# Altium PCB DebugBoard.PcbDoc
Units mil, origin at the board's own origin, x right, y up, seen from the top; angles counter-clockwise.
Board outline 1300 x 1525 mil, 2 copper layers (Top Layer, Bottom Layer), stack 83.452 mil thick; 19 components, 18 nets, 99 pads, 21 vias.
Unrouted connection lines stored in the file: 18.
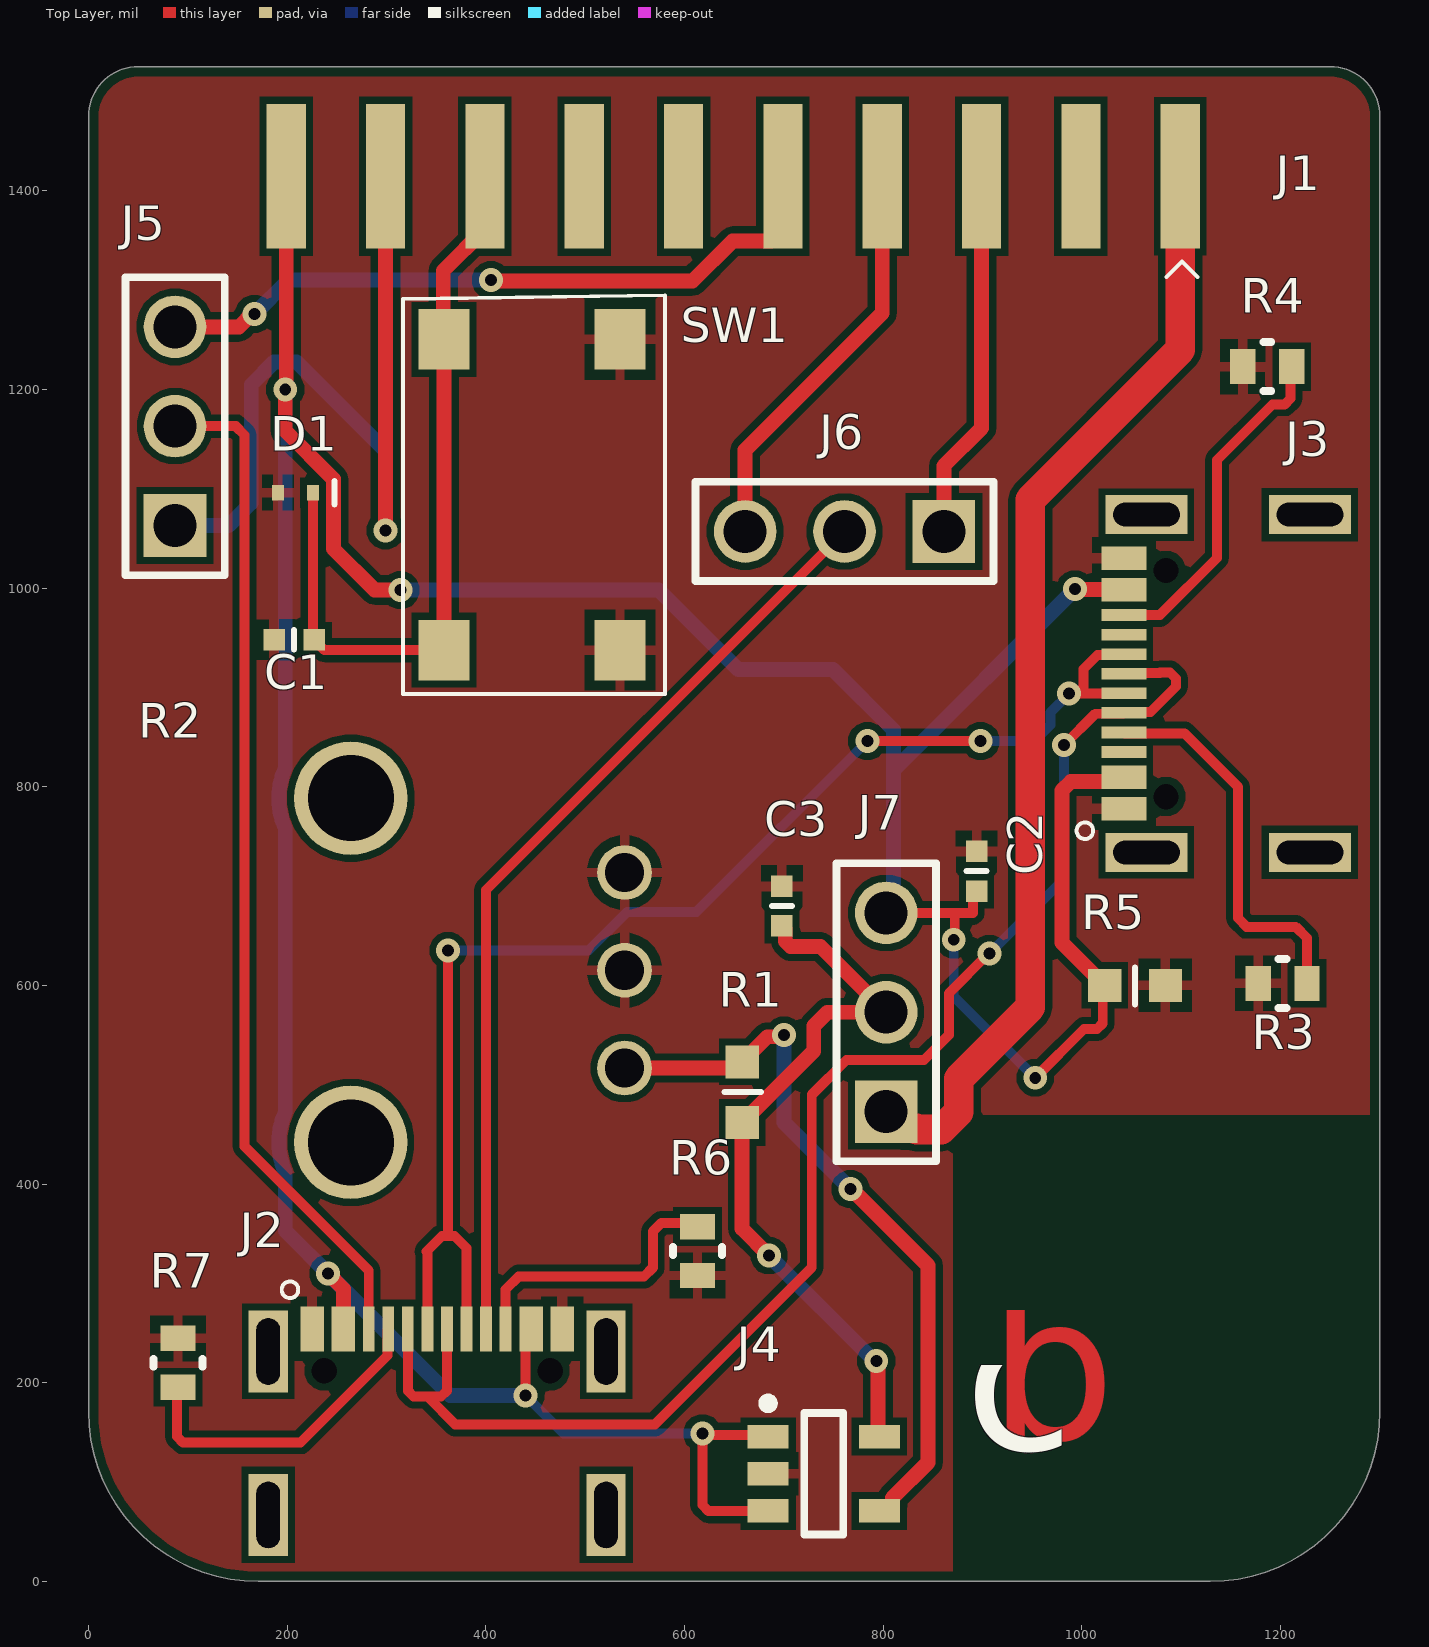
[diagram p0: Top Layer view]
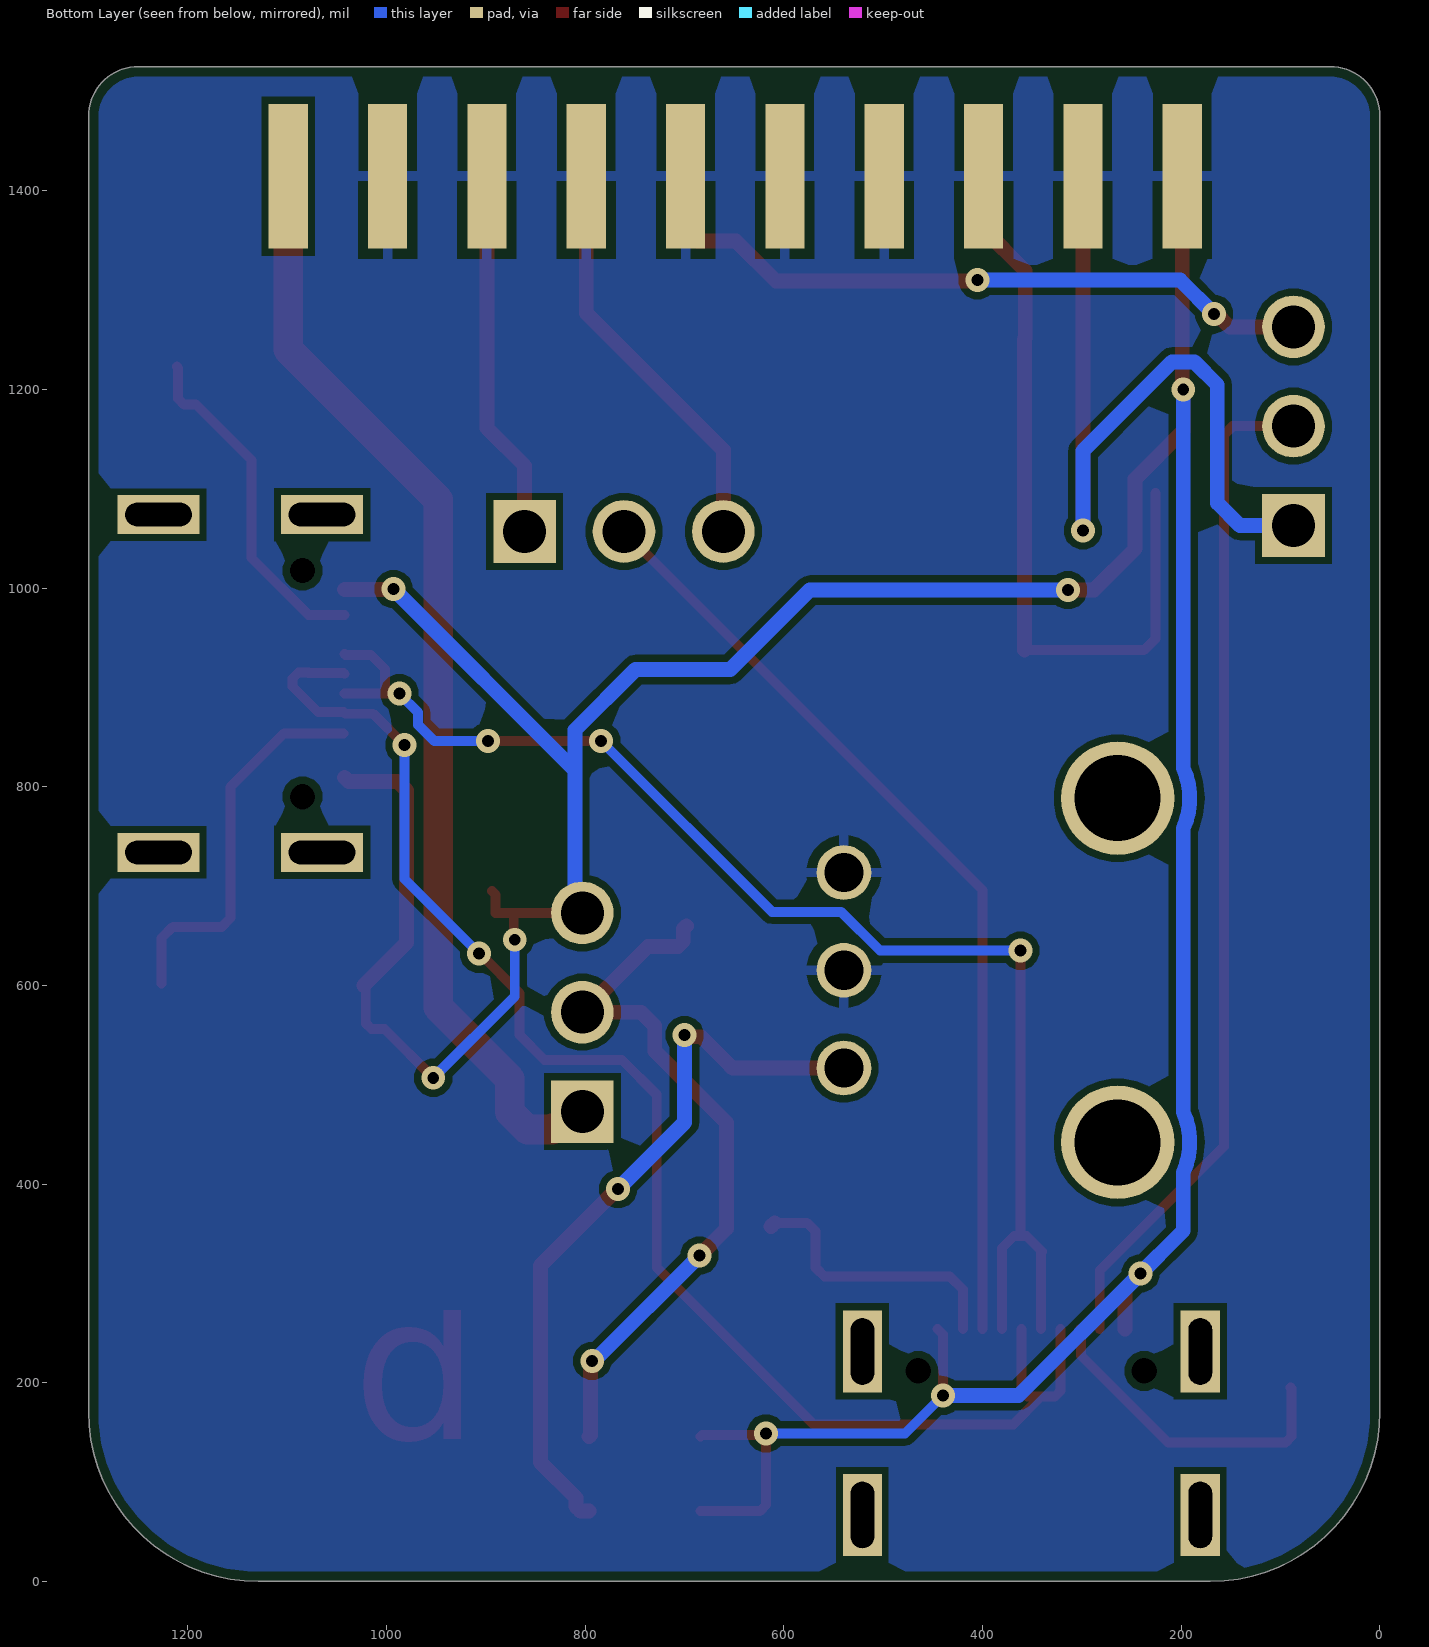
[diagram p1: Bottom Layer view, seen from below]
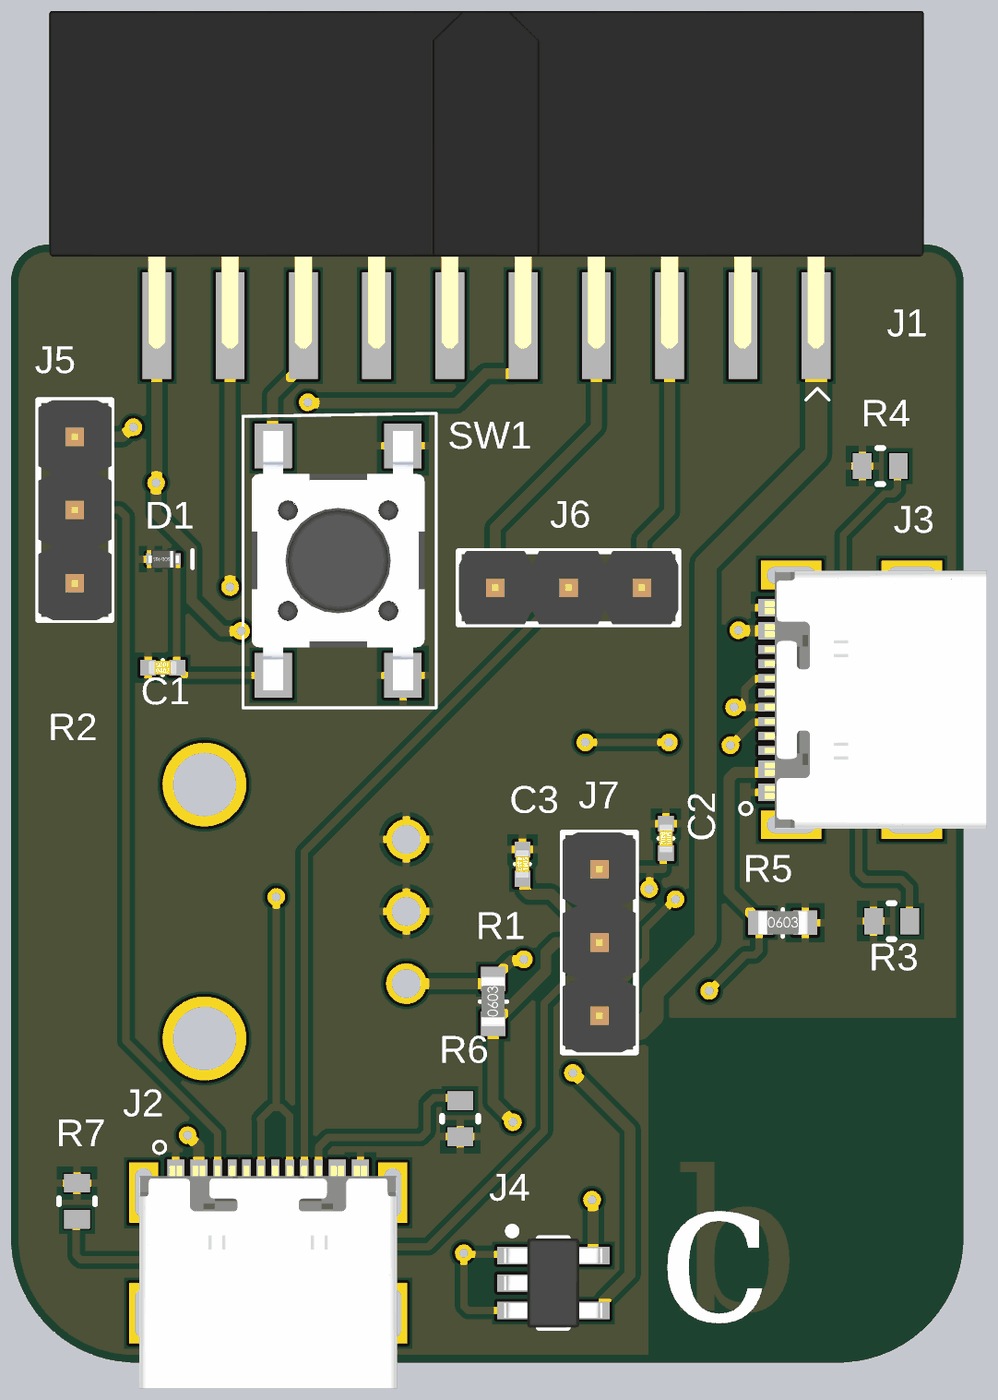
[diagram p2: 3D render of the assembled board from above, using the file's embedded part models]

## Layer stack, top to bottom
Top Solder: solder mask 0.4, Solder Resist, Dk 3.5
Top Layer: signal copper 1.4
Dielectric 1: dielectric 80.652, FR-4, Dk 4.8
Bottom Layer: signal copper 1.4
Bottom Solder: solder mask 0.4, Solder Resist, Dk 3.5

## Board outline
0,170.71 0,1475 cw(c50,1475) 50,1525 1250,1525 cw(c1250,1475) 1300,1475 1300,170.71 cw(c1129.29,170.71) 1129.29,0 170.71,0 cw(c170.71,170.71)

## Design rules (kind name [scope] priority, off if disabled: settings)
BoardOutlineClearance [All] p1: gap=10 ignorepadtopadclearanceinfootprint=FALSE
Clearance [All] p1: gap=7 ignorepadtopadclearanceinfootprint=FALSE
DiffPairsRouting [All] p1: maxlimit=10 minlimit=2.5 mostfreqgap=5 toplayer_minwidth=7 toplayer_maxwidth=18 toplayer_prefwidth=18 bottomlayer_minwidth=7 bottomlayer_maxwidth=18 bottomlayer_prefwidth=18 impedanceprofiledriven=TRUE maxuncoupledlength=500
HoleSize [All] p1: absolutevalues=TRUE maxlimit=196.85 minlimit=6.02 maxpercent=80.000 minpercent=20.000
MinimumSolderMaskSliver [All] p1: minsoldermaskwidth=1
PolygonConnect [All] p1: thpad.connectstyle=Relief thpad.reliefconductorwidth=10 thpad.reliefentries=4 thpad.polygonreliefangle="90 Angle" thpad.airgapwidth=10 smdpad.connectstyle=Relief smdpad.reliefconductorwidth=10 smdpad.reliefentries=4 smdpad.polygonreliefangle="90 Angle" smdpad.airgapwidth=10 via.connectstyle=Direct via.reliefconductorwidth=10 via.reliefentries=4 via.polygonreliefangle="90 Angle" via.airgapwidth=10
RoutingVias [All] p1: holewidth=12.01 width=24.02 viastyle="Through Hole" minholewidth=10 minwidth=20 maxholewidth=19.68 maxwidth=50
SilkToSolderMaskClearance [IsPad] p1: minsilkscreentomaskgap=1 clearancetoexposedcopper=TRUE
SolderMaskExpansion [All] p1: expansion=4 istentingtop=FALSE
SupplyNets "Schematic Supply Nets_3" [InNet('GND')] p1: voltage=0.000
SupplyNets "Schematic Supply Nets_2" [InNet('V_OUT')] p2: voltage=0.000
SupplyNets "Schematic Supply Nets_1" [InNet('VSRC_SEGGER')] p3: voltage=0.000
SupplyNets "Schematic Supply Nets" [InNet('VDD_DUT')] p4: voltage=0.000
Width [All] p1: maxlimit=1000 minlimit=8.03 preferedwidth=10 minimp=50.000000 maximp=50.000000 favimp=50.000000
26 further rules are at their usual default settings.

## Components (designator, comment, footprint, x,y, rotation, side; value= is the part's Value field where it differs from the comment)
C1 "GCM155R71H104KE02D" CAP-0402 207,948 r0 top value=0.1µF
C2 "0402ZD105KAT2A" CAP-0402 894,715 r270 top
C3 "0402ZD105KAT2A" CAP-0402 698,680 r270 top
D1 "CPDQ3V3U-HF" DIODE-SOD923f 208.29,1096.01 r0 top
J1 "SFH11-PBPC-D10-ST-BK" HDR-V-2X10-F-2.54MM 649,1454 r0 top
J2 "USB4105" CONN-USBC-GCT_USB4105 350.92,254.2 r0 top
J3 "USB4105" CONN-USBC-GCT_USB4105 1042.36,903.92 r90 top
J4 "RT9043GB" MCHP-SOT23-5_N 740.1,108.4 r0 top
J5 "61300311121" HDR-V-1X3 87,1163 r90 top
J6 "61300311121" HDR-V-1X3 761,1057 r180 top
J7 "61300311121" HDR-V-1X3 803,573 r90 top
R1 "RC0603FR-0710KL" RES-0603 658,492.51 r270 top
R2 "P0915N-EC15BR100K" POT-PTV09A-1 264,615.23 r90 top
R3 "5.1K" R0603 1202,602 r0 top
R4 "5.1K" R0603 1186.61,1223 r0 top
R5 "RC0603FR-0710KL" RES-0603 1053.51,600 r180 top
R6 "5.1K" R0603 613,332.61 r90 top
R7 "5.1K" R0603 90,220 r270 top
SW1 "PTS645SK50SMTR92 LFS" BTN-SPST-PTS645SK50SMTR92 446.42,1093.99 r90 top

## Footprints (in the part's own frame and the unit in brackets; to place one, negate y for a bottom-side part, rotate by r counter-clockwise, add the part's x,y. Pads: shape width x height; smd on the part's side, far side on the other; paste and mask are expansions set on the pad)
BTN-SPST-PTS645SK50SMTR92 [mm]
  rect 1.55x1.3 smd: 1(-3.975,2.25) 2(3.975,2.25) 3(-3.975,-2.25) 4(3.975,-2.25)
  silkscreen extent -5.1,-3.4 5.1,3.3, body extent -4.5,-3 4.5,3, height 5.1
CAP-0402 [mm]
  rect 0.55x0.55 smd: 1(-0.508,0) 2(0.508,0)
  silkscreen extent 0,-0.25 0,0.25, body extent -0.5,-0.25 0.5,0.25, height 0.5
CONN-USBC-GCT_USB4105 [mm]
  rect 0.6x1.15 smd: A1(-3.2,0) A4(-2.4,0) A9(2.4,0) A12(3.2,0)
  rect 0.3x1.15 smd: A5(-1.25,0) A6(-0.25,0) A7(0.25,0) A8(1.25,0) B5(1.75,0) B6(0.75,0) B7(-0.75,0) B8(-1.75,0)
  rect 1x2.1 hole 0.6 slot 1.7 at 90 deg: ME(-4.32,-4.755) ME(-4.32,-0.575) ME(4.32,-4.755) ME(4.32,-0.575)
  round 0.4 hole 0.65 unplated: ""(-2.89,-1.075) ""(2.89,-1.075)
  silkscreen extent -3.97,0.79 -3.55,1.21, body extent -4.47,-7.35 4.47,0.35, height 3.26
DIODE-SOD923f [mm]
  rect 0.3x0.4 smd: 1(0.45,0) 2(-0.45,0)
  silkscreen extent 1,-0.3 1,0.3, body extent -0.53,-0.32 0.52,0.32, height 0.43
HDR-V-1X3 [mm]
  rect 1.6x1.6 hole 1.1: 1(-2.54,0)
  round 1.6 hole 1.1: 2(0,0) 3(2.54,0)
  silkscreen extent -3.81,-1.27 3.81,1.27, body extent -3.81,-1.27 3.81,1.27, height 8.55
HDR-V-2X10-F-2.54MM [mm]
  rect 1x3.7 smd: 1(11.43,-1) 3(8.89,-1) 5(6.35,-1) 7(3.81,-1) 9(1.27,-1) 11(-1.27,-1) 13(-3.81,-1) 15(-6.35,-1) 17(-8.89,-1) 19(-11.43,-1)
  rect 1x3.7 smd far side: 2(11.43,-1) 4(8.89,-1) 6(6.35,-1) 8(3.81,-1) 10(1.27,-1) 12(-1.27,-1) 14(-3.81,-1) 16(-6.35,-1) 18(-8.89,-1) 20(-11.43,-1)
  silkscreen extent 11.08,-3.58 11.88,-3.18, body extent -15.16,-1.8 15.16,9.9, height 3.04
MCHP-SOT23-5_N [mm] "SOT23, 5-Leads, Body 3.10x1.80mm, Pitch 0.95mm, IPC Medium Density"
  rect 1.05x0.6 smd: 1(-1.425,0.95) 2(-1.425,0) 3(-1.425,-0.95) 4(1.425,-0.95) 5(1.425,0.95)
  silkscreen extent -1.55,-1.55 0.5,1.92, body extent -1.7,-1.55 1.7,1.55, height 1.45
POT-PTV09A-1 [mm] "Pot, vertical, single turn, PCB mount, TH"
  round 1.4 hole 1: 1(-2.5,-7) 2(0,-7) 3(2.5,-7)
  round 2.9 hole 2.2: ME(-4.4,0) ME(4.4,0)
  body extent -4.85,-7.4 4.85,7, height 20
R0603 [mm]
  rect 0.65x0.9 smd paste+0 mask+0.05: 1(-0.625,0) 2(0.625,0)
  silkscreen extent -0.1,-0.63 0.1,0.63, body extent -0.76,-0.38 0.76,0.38, height 0.46
RES-0603 [mm]
  rect 0.85x0.85 smd: 1(-0.775,0) 2(0.775,0)
  silkscreen extent 0,-0.46 0,0.48, body extent -0.85,-0.4 0.85,0.4, height 0.56

## Part data
C1: library part CAP-0.1uF-50V-0402, "CAP CER 0.1UF 50V X7R 0402 10%", Capacitance=100nF, Case Code (Imperial)=0402, Case Code (Metric)=1005, Dielectric=X7R, Manufacturer 1=Murata, Max Operating Temperature=125°C, Min Operating Temperature=-55°C, Package Quantity=10000, Ratings=AEC-Q200, Supplier Part Number 1=490-10672-1-ND, Tolerance=10%, Voltage Rating=50V, Case/Package=0402, ComponentLink1Description=http://www.mouser.com/ds/2/281/c03e-806517.pdf?src-supplier=Mouser, ComponentLink1URL=http://www.mouser.com/ds/2/281/c03e-806517.pdf?src-supplier=Mouser, ComponentLink2Description=http://www.farnell.com/datasheets/2079122.pdf?src-supplier=Farnell, ComponentLink2URL=http://www.farnell.com/datasheets/2079122.pdf?src-supplier=Farnell, ComponentLink3Description=http://www.farnell.com/datasheets/2079122.pdf?src-supplier=Newark, ComponentLink3URL=http://www.farnell.com/datasheets/2079122.pdf?src-supplier=Newark, ComponentLink4Description=http://www.farnell.com/datasheets/2079122.pdf?src-supplier=Element14, ComponentLink4URL=http://www.farnell.com/datasheets/2079122.pdf?src-supplier=Element14, ComponentLink5Description=http://search.murata.co.jp/Ceramy/image/img/A01X/partnumbering_e_02.pdf?src-supplier=Digi-Key, ComponentLink5URL=http://search.murata.co.jp/Ceramy/image/img/A01X/partnumbering_e_02.pdf?src-supplier=Digi-Key, Height=0.5mm, Lead Free="Lead Free", Length=0.039inch, Manufacturer Part Number 1=GCM155R71H104KE02D, Mount="Surface Mount", Packaging="Tape and Reel", Pricing 1="1=0.10000, 10=0.06100, 100=0.02730, 500=0.01952, 1000=0.01533, 2500=0.01394, 5000=0.01282 (USD)", REACH SVHC="No SVHC", RoHS=Yes, Stock 1=254896, Supplier 1=Digi-Key, Termination=SMD/SMT, Thickness=0.022inch, Voltage Rating (DC)=50V, Weight=0.000212oz, Width=0.5mm
C2 C3: library part CAP-1uF-10V-0402, "AVX - 0402ZD105KAT2A - SMD Multilayer Ceramic Capacitor, 1 µF, 10 V, 0402 [1005 Metric], ± 10%, X5R, AVX 0402 MLCC", Capacitance=1uF, Case Code (Imperial)=0402, Case Code (Metric)=1005, Dielectric=X5R, Dielectric Material=Ceramic, Manufacturer 1="Kyocera AVX", Max Operating Temperature=85°C, Min Operating Temperature=-55°C, Package Quantity=1, Supplier Part Number 1=478-4596-1-ND, Tolerance=10%, Voltage=10V, Case/Package=0402, Category="Ceramic Capacitors", ComponentLink1Description=https://datasheet.ciiva.com/151/cx5r-151901.pdf?src-supplier=Digi-Key, ComponentLink1URL=https://datasheet.ciiva.com/151/cx5r-151901.pdf?src-supplier=Digi-Key, ComponentLink2Description=https://datasheet.ciiva.com/151/cx5r-151902.pdf?src-supplier=Digi-Key, ComponentLink2URL=https://datasheet.ciiva.com/151/cx5r-151902.pdf?src-supplier=Digi-Key, ComponentLink3Description=https://datasheet.ciiva.com/151/cx5r-151903.pdf?src-supplier=Digi-Key, ComponentLink3URL=https://datasheet.ciiva.com/151/cx5r-151903.pdf?src-supplier=Digi-Key, ComponentLink4Description=https://datasheet.ciiva.com/11464/cx5r-11464568.pdf?src-supplier=Avnet, ComponentLink4URL=https://datasheet.ciiva.com/11464/cx5r-11464568.pdf?src-supplier=Avnet, ComponentLink5Description=https://datasheet.ciiva.com/6159/lt-6159749.pdf?src-supplier=Farnell, ComponentLink5URL=https://datasheet.ciiva.com/6159/lt-6159749.pdf?src-supplier=Farnell, ComponentLink6Description=https://datasheet.ciiva.com/1124/1666675-1124066.pdf?src-supplier=Element14, ComponentLink6URL=https://datasheet.ciiva.com/1124/1666675-1124066.pdf?src-supplier=Element14, ComponentLink7Description=https://datasheet.ciiva.com/1124/1666675-1124067.pdf?src-supplier=Element14, ComponentLink7URL=https://datasheet.ciiva.com/1124/1666675-1124067.pdf?src-supplier=Element14, ComponentLink8Description=https://datasheet.ciiva.com/16448/cx5r-16448997.pdf?src-supplier=Future+Electronics, ComponentLink8URL=https://datasheet.ciiva.com/16448/cx5r-16448997.pdf?src-supplier=Future+Electronics, Construction=Flat, Contact Plating=Tin,Matte, Depth=0.5mm, Height=0.56mm, Lead Free="Lead Free", Lead Pitch=5.08mm, Length=1mm, Manufacturer Part Number 1=0402ZD105KAT2A, Mount="Surface Mount", Packaging="Cut Tape", Pricing 1="1=0.12000, 10=0.08800, 50=0.05000, 100=0.04140, 500=0.02900, 1000=0.02401, 2500=0.02235, 5000=0.02045 (USD)", Radiation Hardening=No, REACH SVHC="No SVHC", RoHS=Yes, RoHS Compliant=Yes, Series=-, Stock 1=2474650, Supplier 1=Digi-Key, Termination=SMD/SMT, Thickness=0.022inch, Voltage Rating=10V, Voltage Rating (DC)=10V, Width=0.02inch
D1: library part DIODE-TVS-3.3V-SOD923F, "TVS DIODE 3.3V 10.4V SOD923F", Breakdown Voltage=5V, Clamping Voltage=14.1V, Manufacturer 1=Comchip, Max Operating Temperature=150°C, Min Operating Temperature=-55°C, Package Quantity=8000, Peak Pulse Current=9.8A, Peak Pulse Power=102W, Power Line Protection=No, Resistor Type=Zener, Reverse Standoff Voltage=3.3V, Supplier Part Number 1=641-1477-1-ND, Category="TVS Diodes", ComponentLink1Description=https://datasheet.ciiva.com/6578/cpdq3v3u-hf-6578247.pdf?src-supplier=Digi-Key, ComponentLink1URL=https://datasheet.ciiva.com/6578/cpdq3v3u-hf-6578247.pdf?src-supplier=Digi-Key, ComponentLink2Description=https://datasheet.ciiva.com/12545/cpdq3v3u-hf-216634-12545533.pdf?src-supplier=Mouser, ComponentLink2URL=https://datasheet.ciiva.com/12545/cpdq3v3u-hf-216634-12545533.pdf?src-supplier=Mouser, Diode Type=ZENER, Manufacturer Part Number 1=CPDQ3V3U-HF, Min Breakdown Voltage=5V, Mount="Surface Mount", Number of Channels=1, Number of Unidirectional Channels=1, Packaging="Tape and Reel", Pricing 1="1=0.35000, 10=0.29000, 100=0.15360, 500=0.10106, 1000=0.06872, 2000=0.06199 (USD)", RoHS=Yes, RoHS Compliant=Yes, Series=-, Stock 1=9425, Supplier 1=Digi-Key, Termination=SMD/SMT
J1: library part HDR-V-2X10-F-2.54MM, "20 Position Header Connector 0.100\" (2.54mm) Through Hole Gold", Color=Black, Manufacturer 1=Sullins, Package Quantity=1, Supplier Part Number 1=S9197-ND, Category="Headers and Wire Housings", ComponentLink1Description=https://datasheet.ciiva.com/754/sfh11-pxxc-dxx-st-xx11160-c-754558.pdf?src-supplier=Digi-Key, ComponentLink1URL=https://datasheet.ciiva.com/754/sfh11-pxxc-dxx-st-xx11160-c-754558.pdf?src-supplier=Digi-Key, Connector Type=Header, Contact Plating=Gold, Contact Type="Female Socket", Lead Free="Lead Free", Manufacturer Part Number 1=SFH11-PBPC-D10-ST-BK, Mount="Through Hole", Number of Positions=20, Number of Rows=2, Packaging=Tray, Pitch=0.1inch, Pricing 1="1=1.15000, 10=0.96800, 80=0.86925, 440=0.71118, 1000=0.63216, 5000=0.57070 (USD)", RoHS=Yes, RoHS Compliant=Yes, Row Spacing=0.1inch, Series=SFH11, Stock 1=51703, Supplier 1=Digi-Key, Termination=Solder
J2 J3: library part CONN-F-USB-C-GCT_USB4105, "Usb Conn, 2.0 Type C, Rcpt, 16Pos, Smt Rohs Compliant: Yes", Manufacturer 1="Global Connector Technology", Manufacturer Part Number 1=USB4105-GF-A, Supplier Part Number 1=86AH2021, Pricing 1="1=0.85100, 10=0.69300, 25=0.63100, 50=0.58700, 100=0.54000 (USD)", RoHS=No, Stock 1=1960, Supplier 1=Newark
J4: library part CMP-00001-3, "Linear Voltage Regulator IC Positive Adjustable 1 Output 1.2 V ~ 3.3 V 400mA SOT-23-5", Case/Package=SOT-23-5, Dropout Voltage=230mV, Max Operating Temperature=85°C, Max Output current=400mA, Max Supply Voltage=5.5V, Min Input Voltage=2.2V, Min Operating Temperature=-40°C, Output Voltage=3.3V, Power Rating=400mW, Quiescent Current=50uA, Lead Free="Lead Free", Min Current Limit=400mA, Mounting Technology="Surface Mount", Number of Outputs=1, Number of Regulators=1, Output Current=400mA, Packaging="Cut Tape", Pins=5, Reach SVHC Compliant=No, RoHS Compliant=Yes, Series=-
J5 J6 J7: library part HDR-V-1X3-M, "Header, 3-Pin, 0.1\"", Colour=Black, Manufacturer="Wurth Electronics", Supplier Part Number 1=732-5316-ND, ComponentLink1Description=http://www.farnell.com/cad/1737268.pdf, ComponentLink1URL=http://www.farnell.com/cad/1737268.pdf, ComponentLink2Description=http://katalog.we-online.de/em/datasheet/6130xx11121.pdf, ComponentLink2URL=http://katalog.we-online.de/em/datasheet/6130xx11121.pdf, Connector Type="Male Pin", Contact Material=Copper, Contact Mating Length=0.236inch, Contact Plating=Gold, Gender=Male, LatestRevisionDate=17-Jul-2002, LatestRevisionNote="Re-released for DXP Platform.", Lead Free="Lead Free", Manufacturer 1="Wurth Electronics", Manufacturer Part Number 1=61300311121, Mount="Through Hole", MPN=61300311121, Number of Contacts=3, Number of Positions=3, Number of Rows=1, Packaging=Bulk, Pitch=0.1inch, Pricing 1="1=0.13, 10=0.106, 25=0.088, 50=0.074, 100=0.067, 1000=0.061 (USD)", Publisher="Altium Limited", REACH SVHC=Unknown, Stock 1=41782, Supplier 1=Digi-Key, Termination=Solder
R1 R5: library part RES-10K-0603-1%, "Res General Purpose Thick Film 0603 10K Ohm 1% 1/10W ±100ppm/°C Molded SMD Paper T/R", Case Code (Imperial)=0603, Case Code (Metric)=1608, Manufacturer 1=Yageo, Max Operating Temperature=155°C, Min Operating Temperature=-55°C, Power Rating=100mW, Resistance=10kΩ, Supplier Part Number 1=311-10.0KHRCT-ND, Temperature Coefficient=100ppm/°C, Tolerance=1%, Voltage Rating=75V, Voltage Rating (DC)=50V, Case/Package=0603, Category="Chip SMD Resistors", ComponentLink1Description=https://datasheet.ciiva.com/7660/38590-7660789.pdf?src-supplier=Element14, ComponentLink1URL=https://datasheet.ciiva.com/7660/38590-7660789.pdf?src-supplier=Element14, ComponentLink2Description=https://datasheet.ciiva.com/15189/getdatasheetpartid-409289-15189591.pdf?src-supplier=Verical, ComponentLink2URL=https://datasheet.ciiva.com/15189/getdatasheetpartid-409289-15189591.pdf?src-supplier=Verical, ComponentLink3Description=https://datasheet.ciiva.com/46440/1868787-46440891.pdf?src-supplier=Element14, ComponentLink3URL=https://datasheet.ciiva.com/46440/1868787-46440891.pdf?src-supplier=Element14, ComponentLink4Description=https://datasheet.ciiva.com/7983/443971-7983596.pdf?src-supplier=Element14, ComponentLink4URL=https://datasheet.ciiva.com/7983/443971-7983596.pdf?src-supplier=Element14, ComponentLink5Description=https://datasheet.ciiva.com/7746/1738695-7746239.pdf?src-supplier=Element14, ComponentLink5URL=https://datasheet.ciiva.com/7746/1738695-7746239.pdf?src-supplier=Element14, ComponentLink6Description=https://datasheet.ciiva.com/22747/443971-22747519.pdf?src-supplier=Element14, ComponentLink6URL=https://datasheet.ciiva.com/22747/443971-22747519.pdf?src-supplier=Element14, Composition="Thick Film", Depth=0.8mm, Height=0.45mm, Lead Free="Lead Free", Lead Pitch=0.3mm, Length=1.6mm, Manufacturer Part Number 1=RC0603FR-0710KL, Military Standard=Not, Number of Pins=2, Packaging="Tape and Reel", Pricing 1="1=0.10000, 10=0.02200, 100=0.00900, 1000=0.00405, 2500=0.00352 (USD)", REACH SVHC="No SVHC", RoHS=Yes, Stock 1=10827165, Supplier 1=Digi-Key, Termination=SMD/SMT, Weight=7.1E-05oz, Width=0.8mm
R2: library part POT_100K_PCBMOUNT, "Pot, 100k, vertical, single turn, PCB mount, TH, P0915N-EC15BR100K", Manufacturer 1="TT Electronics/BI", Manufacturer Part Number 1=P0915N-EC15BR100K
R3 R4 R6 R7: library part RES_5_1K, "RES 5.1K OHM 1% 1/10W 0603", Manufacturer=YAGEO, Manufacturer Part Number=RC0603FR-075K1L, Power=0.1W, ComponentLink1Description=Datasheet, ComponentLink1URL=https://www.yageo.com/upload/media/product/products/datasheet/rchip/PYu-RC_Group_51_RoHS_L_12.pdf, PCB Footprint=R0603
SW1: library part BTN-SPST-PTS645SK50SMTR92, "C & K COMPONENTS - PTS645SK50SMTR92LFS - SWITCH, SPST, 0.05A, 12VDC, SMD, 5MM", Case/Package=SMD/SMT, Color=Red, Contact Resistance=100mR, Current Rating=50mA, Manufacturer 1="ITT C&K", Manufacturer Part Number 1=PTS645SK50SMTR92LFS, Max Operating Temperature=60°C, Max Voltage Rating (DC)=12V, Min Operating Temperature=-20°C, Operating Force=260gf, Package Quantity=1, Supplier Part Number 1=CKN9087CT-ND, Actuator Length=1.55mm, Actuator Material=Nylon,Polyamide,PA66, Actuator Type=Standard, Category="Tactile Switches", ComponentLink1Description=https://datasheet.ciiva.com/29903/getdatasheetpartid-741134-29903854.pdf?src-supplier=Verical, ComponentLink1URL=https://datasheet.ciiva.com/29903/getdatasheetpartid-741134-29903854.pdf?src-supplier=Verical, ComponentLink2Description=https://datasheet.ciiva.com/14920/pts645-14920581.pdf?src-supplier=Digi-Key, ComponentLink2URL=https://datasheet.ciiva.com/14920/pts645-14920581.pdf?src-supplier=Digi-Key, ComponentLink3Description=https://datasheet.ciiva.com/22637/1707731-22637358.pdf?src-supplier=Element14, ComponentLink3URL=https://datasheet.ciiva.com/22637/1707731-22637358.pdf?src-supplier=Element14, Contact Material=Bronze, Contact Plating=Silver, Depth=9mm, Illumination Type=Non-Illuminated,Illuminated, Lead Free="Lead Free", Length=6mm, Max Current Rating=50mA, Mechanical Life=100000Cycles, Mount="Surface Mount", Orientation=Straight, Packaging="Tape and Reel", Pricing 1="1=0.15000, 10=0.14900, 25=0.14120, 100=0.12840, 250=0.12068, 500=0.11042 (USD)", REACH SVHC="No SVHC", RoHS=Yes, RoHS Compliant=Yes, Series=PTS645, Stock 1=52601, Supplier 1=Digi-Key, Switch Function=Off-Mom, Termination="Gull Wing", Throw Configuration=SPST, Voltage Rating (DC)=12V

## Via types
v1: diameter 24.02, hole 12.01, Top Layer to Bottom Layer, 21 vias

## Nets (pads, with @x,y where several pads share a name; then routed paths per layer and width w, separated by ;. In a path a pad name is that pad's centre, name@x,y a point inside that pad or via, vN(x,y) a via of type N, cw(c..) or ccw(c..) an arc to the next point about the centre after c; other vN are vias at no path point)
D_MINUS: J2.A7 J2.B7 J3.A7 J3.B7 | length 1510.9
  Top Layer w10: J2.B7 321.39,191.86 327.25,186 341.08,186 ; J2.A7 360.76,191.86 354.91,186 341.08,186 ; v1(907,632) 906,632 866,592 866,550 841,525 763,525 728,490 728,316 570,158 369.08,158 341.08,186 ; v1(982.01,842.06) 1013.44,873.49 1041.46,873.49 J3.B7 1043.27,875.3 1069.1,875.3 1094.66,900.86 1094.66,909.14 1088.8,915 1078.8,915 1078.47,914.67 1043.27,914.67 J3.A7
  Bottom Layer w10: v1(907,632) 982,707 v1(982.01,842.06)
D_PLUS: J2.A6 J2.B6 J3.A6 J3.B6 | length 1370.3
  Top Layer w10: J2.A6 341.08,331.17 340.12,332.12 355.79,347.79 362,347.79 ; v1(362,635) 362,347.79 ; J2.B6 380.45,335.55 368.21,347.79 362,347.79 ; v1(784,846) v1(898,846) ; v1(987,894) 989.68,896.68 1001.68,896.68 ; J3.A6 1042.32,894.04 999.04,894.04 1001.68,896.68 ; J3.B6 1041.46,932.54 1015.63,932.54 1001.68,918.6 1001.68,896.68
  Bottom Layer w10: v1(362,635) 503.42,635 542.51,674.09 612.09,674.09 v1(784,846) ; v1(898,846) 952,846 968.16,862.16 968.16,874.65 987,893.49 v1(987,894)
GND: C1.1 C2.1 C3.1 D1.2 J1.4 J1.6 J1.8 J1.10 J1.12 J1.14 J1.16 J1.18 J1.20 J2.A1 J2.A12 J3.A1 J3.A12 J4.2 R2.2 R2.3 R3.1 R4.1 R5.1 R6.1 R7.1 SW1.3 SW1.4
NetJ2_A5: J2.A5 R7.2 | length 327.5
  Top Layer w10: R7.2 89,194.39 89,145.86 94.86,140 213.33,140 300.8,227.47 300.8,253.3 J2.A5
NetJ2_B5: J2.B5 R6.2 | length 283.5
  Top Layer w10: J2.B5 419.82,293.82 433,307 559.21,307 568,315.79 568,352.21 576.79,361 R6.2@609.21,361
  Top Layer w15: R6.2@609.21,361 R6.2
NetJ3_A5: J3.A5 R3.2 | length 391.4
  Top Layer w10: J3.A5@1043.57,853.5 1103.5,853.5 1157,800 1157,667.79 1165.79,659 1215.21,659 1226.61,647.61 R3.2
NetJ3_B5: J3.B5 R4.2 | length 348.4
  Top Layer w10: J3.B5 1078.4,972.82 1136,1030.41 1136,1129 1191.98,1184.98 1204.18,1184.98 1210.04,1190.84 1210.04,1221.82 R4.2
NetJ4_4: J4.4 R1.1 R2.1 | length 739.2
  Top Layer w15: R2.1 651.78,516.8 R1.1 683.33,548.35 698.35,548.35 v1(700,550) ; v1(767,395) 768,395 845,318 845,119.8 809.37,84.17 809.37,75.31 805.06,71 J4.4
  Bottom Layer w15: v1(700,550) 700,462 v1(767,395)
NRST: C1.2 D1.1 J1.15 SW1.1 SW1.2 | length 726.7
  Top Layer w10: D1.1 226,949 C1.2 237.5,937.5 SW1.1 ; SW1.2@357,1251.32 SW1.2
  Top Layer w15: SW1.2@357,1251.32 357,1319.48 J1.15@399,1361.48 ; SW1.1 SW1.2 ; J1.15 J1.15@400,1413.63
SBU1: J2.A8 J6.2 | length 952.3
  Top Layer w10: J2.A8 400.13,696.13 J6.2
SBU2: J2.B8 J5.2 | length 1025.4
  Top Layer w10: J5.2 148.21,1163 157,1154.21 157,438 282.02,312.98 J2.B8
SWCLK/TCLK: J1.9 J5.3 | length 706.8
  Top Layer w15: J5.3 151.56,1263 164.56,1276 v1(167,1276) ; v1(405,1310) 406,1309 607.85,1309 648.15,1349.3 686.81,1349.3 699,1361.48 J1.9
  Bottom Layer w15: v1(167,1276) 201,1310 v1(405,1310)
SWDIO/TMS: J1.7 J6.3 | length 415.5
  Top Layer w15: J6.3 661,1139 799,1277 J1.7 J1.7@799.5,1414.13
UART_RX: J1.17 J5.1 | length 823.5
  Top Layer w15: v1(299,1058) J1.17
  Bottom Layer w15: J5.1 141,1063 163.79,1085.8 163.79,1204.74 186.59,1227.54 209.41,1227.54 299,1137.95 v1(299,1058)
UART_TX: J1.5 J6.1 | length 373.4
  Top Layer w15: J6.1 861,1123 899,1161 J1.5
V_OUT: C3.2 J4.5 J7.2 R1.2 | length 728.5
  Top Layer w15: v1(685,328) 658,355 R1.2 730,534 730,559.14 743.86,573 J7.2 737,639 706.79,639 701.33,644.46 701.33,656.67 C3.2 ; v1(793,222) 794.6,220.4 794.6,147.41 J4.5
  Bottom Layer w15: v1(685,328) 791,222 v1(793,222)
VDD_DUT: J1.1 J7.1 | length 1122.2
  Top Layer w30: J7.1 819.5,456.5 832.07,456.5 833.57,455 858.43,455 876,472.57 876,506 948,578 948,1089 1099,1240 J1.1
VSRC_SEGGER: C2.2 J1.19 J2.A4 J2.A9 J3.A4 J3.A9 J4.1 J4.3 J7.3 R5.2 | length 3949.8
  Top Layer w10: v1(440,187) 439.91,187.09 439.91,248.7 J2.A9 ; J4.3 623.86,71 618,76.86 v1(618,149) 619.6,147.4 682.4,147.4 J4.1 ; J7.3@804.5,671.5 J7.3 872,673 ; v1(871,646) 872,647 872,673 ; C2.2 890.14,691.14 890.14,673 872,673 ; v1(953,507) 1002,556 1015.14,556 1021,561.86 1021,598 R5.2
  Top Layer w15: J1.19 199,1201 v1(198,1200) 198,1158.29 246.41,1109.88 246.41,1039.59 288,998 v1(314,998) ; v1(241,310) 256.43,294.57 J2.A4 ; v1(993,999) 993.59,998.41 J3.A9 ; R5.2 980,643 980,796.34 988.79,805.12 1038.05,805.12 J3.A4
  Bottom Layer w10: v1(440,187) 478,149 v1(618,149) ; v1(871,646) 871,589 v1(953,507)
  Bottom Layer w15: v1(198,1200) 198,818.75 ccw(c264,788.46) 198,758.17 198,472.29 ccw(c264,442) 198,411.71 198,353 202.39,348.61 v1(241,310) 364,187 v1(440,187) ; v1(314,998) 574,998 654,918 749.49,918 810.51,856.98 810.51,816.51 ; J7.3 810.51,680.51 810.51,816.51 ; v1(993,999) 810.51,816.51
pads on no net: J1.2 J1.3 J1.11 J1.13 J2. J2.ME J3. J3.A8 J3.B8 J3.ME R2.ME

## Polygon pours and split planes (outlines as drawn)
GND on Bottom Layer "NONET_L-01_P-001" (solid, remove dead copper, pour order 0): 0,1525 1300,1525 1300,0 0,0
GND on Top Layer "NONET_L-01_P-001" (solid, remove dead copper, pour order 1): 0,1525 1300,1525 1300,0 0,0

## Other copper
Top Layer:
  pour cut-out: 1289.8,10.2 1290,10.39 1290,470 870,470 870,10
  text "b" at 906,71 h380

## Silkscreen, mask and mechanical layers (free items; w line width, h text height)
Top Overlay:
  text "c" at 881.75,57.25 h400
Board Outline:
  the board outline again, w3.94